# Altium PCB BMS.PcbDoc
Units mm, origin at the board's own origin, x right, y up, seen from the top; angles counter-clockwise.
Board outline 136.1 x 96.8 mm, 2 copper layers (Component Side, Solder Side); 92 components, 118 nets, 443 pads, 147 vias.
Unrouted connection lines stored in the file: 4.
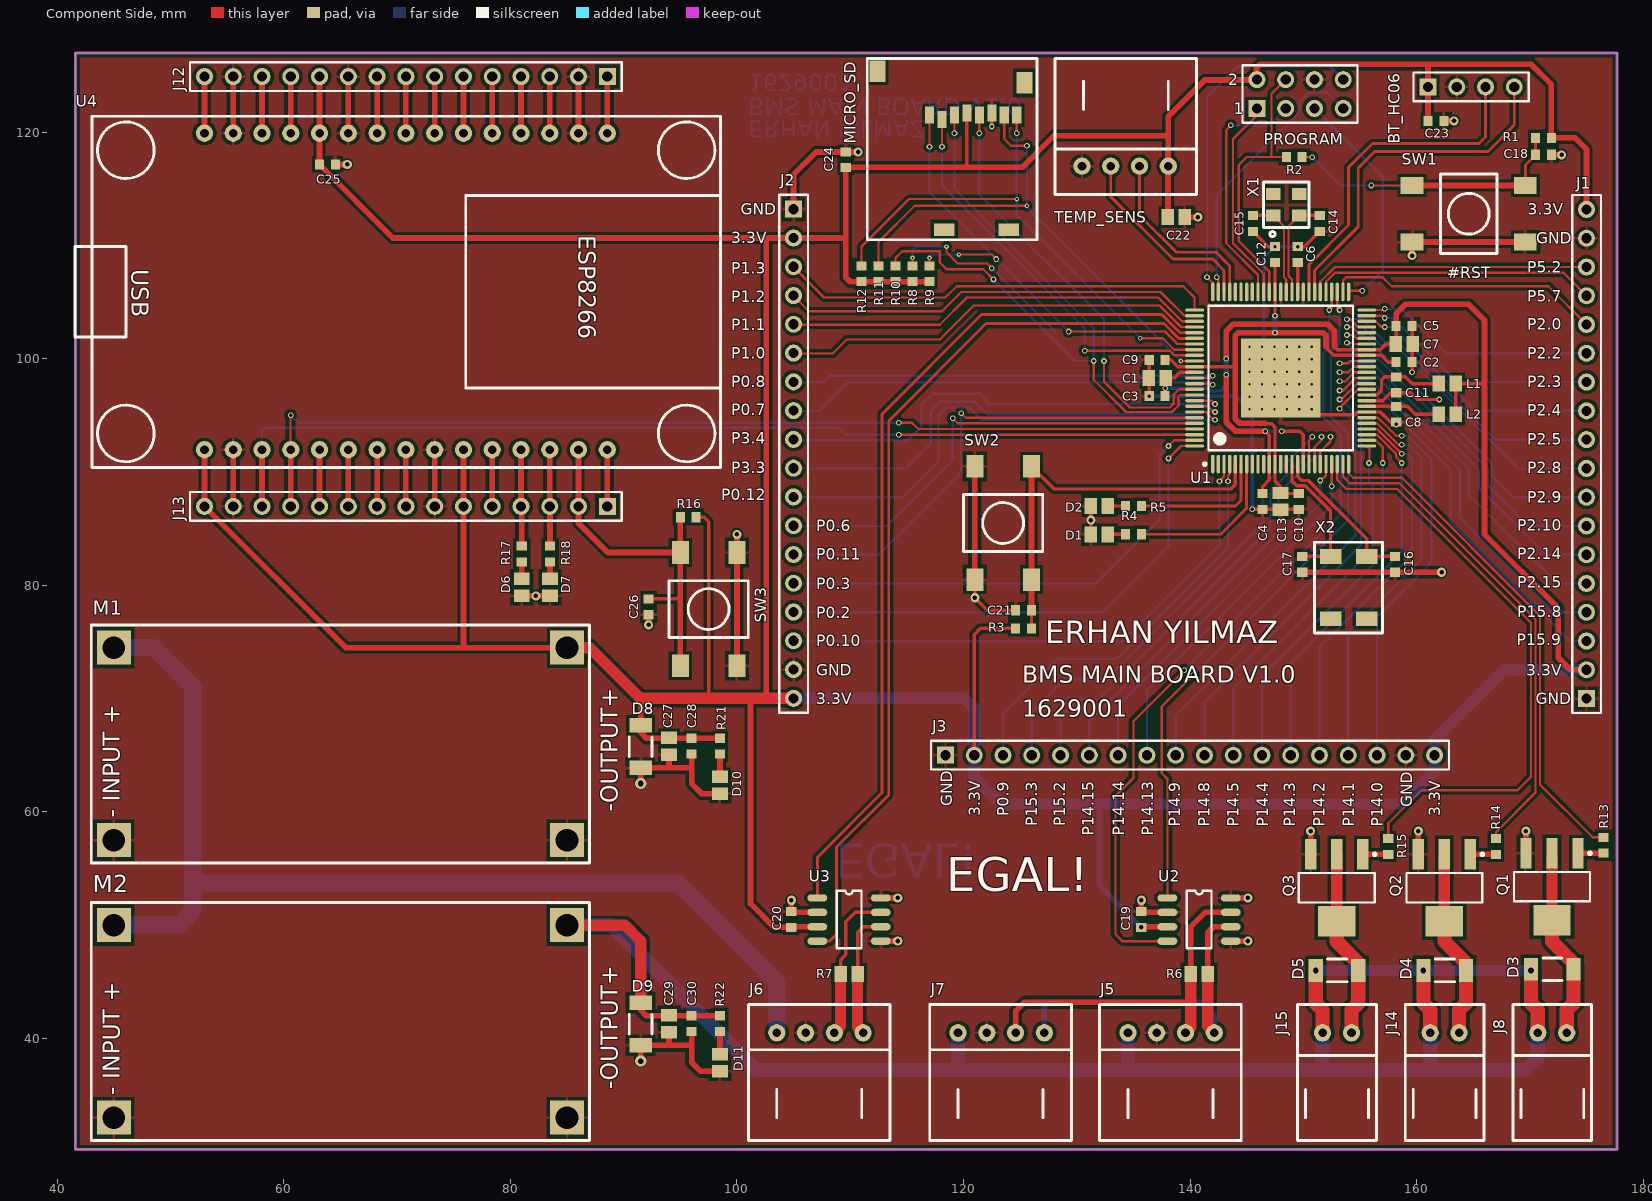
[diagram p0: Component Side view]
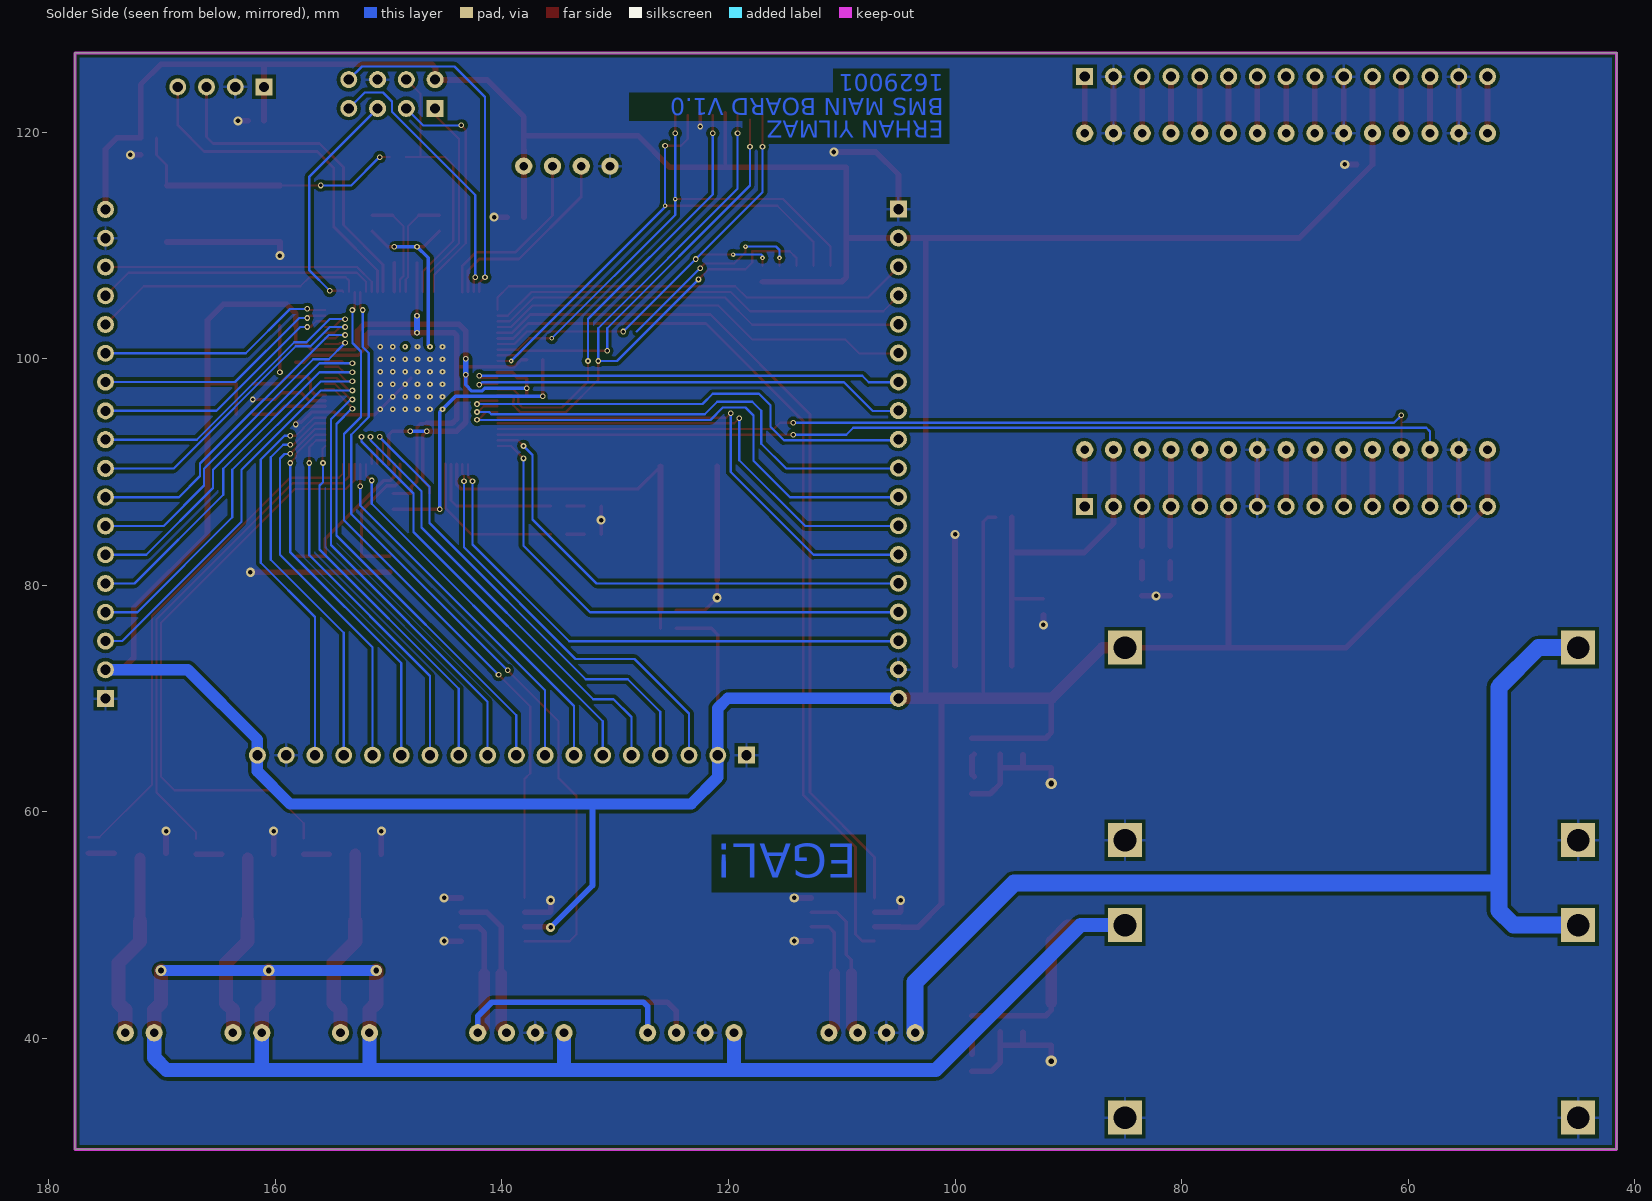
[diagram p1: Solder Side view, seen from below]

## Layer stack, top to bottom
Component Side: signal copper 0.0356
Dielectric: core 0.32, FR-4, Dk 4.8
Solder Side: signal copper 0.0356

## Board outline
41.6,30.2 41.6,127 177.7,127 177.7,30.2

## Design rules (kind name [scope] priority, off if disabled: settings)
Clearance Clearance_1 [All vs InPolygon] p1: gap=0.3
Clearance [All] p2: gap=0.2
PolygonConnect PolygonConnect_1 [IsVia] p1: connectstyle=Direct reliefconductorwidth=0.254 reliefentries=4 polygonreliefangle="90 Angle"
PolygonConnect [All] p2: connectstyle=Relief reliefconductorwidth=0.254 reliefentries=4 polygonreliefangle="90 Angle"
RoutingVias [All] p1: holewidth=0.5 width=0.8 viastyle="Through Hole" minholewidth=0.3 minwidth=0.5 maxholewidth=0.8 maxwidth=1
SilkscreenOverComponentPads [All] p1: minsilkscreentomaskgap=0.254
SolderMaskExpansion [All] p1: expansion=0.102
Width [All] p1: maxlimit=2 minlimit=0.2 preferedwidth=0.254
27 further rules are at their usual default settings.

## Classes and differential pairs
component class Sheet1: C1 C2 C3 C4 C5 C6 C7 C8 C9 C10 C11 C12 C13 C14 C15 C16 C17 C18 C19 C20 C21 D1 D2 J1 J2 J3 J5 J6 J7 L1 L2 PROGRAM R1 R2 R3 R4 R5 R6 R7 SW1 SW2 U1 U2 U3 X1 X2
component class Sheet2: BT_HC06 C21 C22 C24 C25 C26 C27 C28 C29 C30 D3 D4 D5 D6 D7 D8 D9 D10 D11 J8 J12 J13 J14 J15 M1 "M1 12V" M2 "M2 3.3V" MICRO_SD Q1 Q2 Q3 R8 R9 R10 R11 R12 R13 R14 R15 R16 R17 R18 R21 R22 SW3 TEMP_SENS U4

## Components (designator, comment, footprint, x,y, rotation, side; value= is the part's Value field where it differs from the comment)
BT_HC06 "HC-06 BT Module" HDR1X4 161,124 r0 top (schematic designator J11)
C1 "10uF" C0805 137.1,98.3 r0 top
C2 "10uF" C0805 158.9,101.3 r180 top
C3 "100nF" 1608[0603]#1 137.1,96.7 r0 top
C4 "100nF" 1608[0603]#1 146.4,87.4 r90 top
C5 "100nF" 1608[0603]#1 158.9,102.9 r180 top
C6 "100nF" 1608[0603]#1 149.5,109.2 r270 top
C7 "100nF" 1608[0603]#1 158.2,97.7 r90 top
C8 "100nF" 1608[0603]#1 158.2,95.1 r90 top
C9 "100nF" 1608[0603]#1 137.1,99.9 r0 top
C10 "100nF" 1608[0603]#1 149.6,87.4 r90 top
C11 "100nF" 1608[0603]#1 158.9,99.7 r180 top
C12 "100nF" 1608[0603]#1 147.5,109.2 r270 top
C13 "10uF" C0805 148,87.4 r90 top
C14 "15pF" 1608[0603]#1 151.45,111.95 r90 top
C15 "15pF" 1608[0603]#1 145.55,111.95 r90 top
C16 "15pF" 1608[0603]#1 158.1,81.85 r90 top
C17 "15pF" 1608[0603]#1 149.9,81.85 r90 top
C18 "10n" 1608[0603]#1 171.2,118 r180 top
C19 "Cap Semi" 1608[0603]#1 135.7,50.5 r270 top
C20 "100nF" 1608[0603]#1 104.8,50.5 r270 top
C21 "10nF" 1608[0603]#1 125.3,77.8 r0 top
C22 "10uF" C0805 138.8,112.5 r180 top
C23 "Cap Semi" 1608[0603]#1 161.7,121 r180 top
C24 "100nF" 1608[0603]#2 109.6,117.6 r270 top
C25 "100nF" 1608[0603]#1 63.85,117.15 r180 top
C26 "10nF" 1608[0603]#1 92.2,78.1 r90 top
C27 "10uF" C0805 94,65.8 r90 top
C28 "100nF" 1608[0603]#1 96,65.8 r90 top
C29 "Cap Semi" C0805 94,41.3 r90 top
C30 "100nF" 1608[0603]#1 96,41.3 r90 top
D1 "SMD LED" C0805 132,84.5 r180 top
D2 "SMD LED" C0805 132,87 r180 top
D3 "LL4148" LL4148 171.95,46.1 r180 top
D4 "LL4148" LL4148 162.45,46 r180 top
D5 "LL4148" LL4148 152.95,46 r180 top
D6 "SMD LED" C0805 81,79.818 r270 top
D7 "SMD LED" C0805 83.5,79.818 r270 top
D8 "4.2V SMD Zener Diode" LL4148 91.5,65.8 r90 top
D9 "15V SMD Zener Diode" LL4148 91.5,41.3 r90 top
D10 "SMD LED" C0805 98.5,62.35 r270 top
D11 "SMD LED" C0805 98.5,37.85 r270 top
J1 "GPIO EXPAND 1" HDR1X18 175,70 r90 top
J2 "GPIO EXPAND 3" HDR1X18 105,113.2 r270 top
J3 "GPIO EXPAND 2" HDR1X18 118.41,65 r0 top
J5 "CAN0_1" "4 Pin header" 138.3,37 r0 top
J6 "CAN1_0" "4 Pin header" 107.3,37 r0 top
J7 "CAN0_2" "4 Pin header" 123.3,37 r0 top
J8 "Contactor 1" "2 Pin Header" 172,38.5 r0 top
J12 "Header, 15-Pin" HDR1X15 88.558,124.908 r180 top
J13 "Header, 15-Pin" HDR1X15 88.558,86.968 r180 top
J14 "Contactor 2" "2 Pin Header" 162.5,38.5 r0 top
J15 "Contactor 3" "2 Pin Header" 153,38.5 r0 top
L1 "BLM8PG600" C0805 162.7,97.8 r0 top
L2 "BLM8PG600" C0805 162.7,95.1 r0 top
M1 "Buck Module 3.3VV" "Buck Module" 65,66 r0 top
M2 "Buck Module 12V" "Buck Module" 65,41.5 r0 top
MICRO_SD "3M_2908-05WB" 3M_2908-05WB 117,121.5 r0 top (schematic designator J9)
PROGRAM "Debug Conn" HDR2X4 145.9,122.1 r0 top (schematic designator J4)
Q1 "IRLL2705" SOT223_M 171.95,53.4 r270 top
Q2 "IRLL2705" SOT223_M 162.45,53.3 r270 top
Q3 "IRLL2705" SOT223_M 152.95,53.3 r270 top
R1 "10K" 1608[0603]#1 171.2,119.5 r180 top
R2 "10K" 1608[0603]#1 149.2,117.8 r0 top
R3 "Res1" 1608[0603]#1 125.3,76.2 r0 top
R4 "Res1" 1608[0603]#1 135,84.5 r0 top
R5 "1K" 1608[0603]#1 135,87 r0 top
R6 "120R" C0805 140.8,45.7 r180 top
R7 "120R" C0805 109.9,45.7 r180 top
R8 "10K" 1608[0603]#1 115.5,107.5 r270 top
R9 "10K" 1608[0603]#1 117,107.5 r270 top
R10 "10K" 1608[0603]#1 114,107.5 r270 top
R11 "10K" 1608[0603]#1 112.5,107.5 r270 top
R12 "10K" 1608[0603]#1 111,107.5 r270 top
R13 "1K" 1608[0603]#1 176.5,57.05 r90 top
R14 "1K" 1608[0603]#1 167,56.95 r90 top
R15 "1K" 1608[0603]#1 157.5,56.95 r90 top
R16 "10K" 1608[0603]#1 95.7,86 r180 top
R17 "1K" 1608[0603]#1 81,82.768 r90 top
R18 "1K" 1608[0603]#1 83.5,82.768 r90 top
R21 "1K" 1608[0603]#1 98.5,65.8 r90 top
R22 "1K" 1608[0603]#1 98.5,41.3 r90 top
SW1 "RST" "Push Button SMD" 164.6,112.8 r270 top
SW2 "Push Button" "Push Button SMD" 123.5,85.5 r180 top
SW3 "Push Button" "Push Button SMD" 97.5,77.9 r0 top
TEMP_SENS "Temp Sensor Conn" "4 Pin Header" 134.3,120.5 r180 top (schematic designator J10)
U1 "XMC4500-F100K1024 AB" INF-PG-LQFP-100-11-7000X7000TP_N 148,98.3 r90 top
U2 "SN65HVD233D" "SOIC 8" 140.8,50.5 r0 top
U3 "SN65HVD233D" "SOIC 8" 109.9,50.5 r0 top
U4 "NodeMCU" NodeMCU 70.778,105.908 r270 top
X1 "12MHz" "SMD Crystall 23.2x2.5mm" 148.5,113.6 r0 top
X2 "32.768kHz" "32kHz smd Crystal" 154,79.8 r270 top

## Footprints (in the part's own frame and the unit in brackets; to place one, negate y for a bottom-side part, rotate by r counter-clockwise, add the part's x,y. Pads: shape width x height; smd on the part's side, far side on the other; paste and mask are expansions set on the pad)
"2 Pin Header" [mil]
  round 60 hole 30: 1(-51.18,78.74) 2(49.21,78.74)
  silkscreen extent -138,-295 136,177
3M_2908-05WB [mm] "3M_2908-05WB micro sd card connector"
  rect 0.8x1.5 smd: 1(0,0) 2(1.1,-0.4) 3(2.2,0) 4(3.3,0.2) 5(4.4,0) 6(5.5,0.2) 7(6.6,0) 8(7.7,0)
  rect 1.4x1.9 smd: S1(-4.6,3.9) S4(8.4,2.85)
  rect 1.8x1.1 smd: S2(1.3,-10.1) S3(7,-10.1)
  silkscreen extent -5.5,-11 9.5,5
"4 Pin header" [mil] "For can bus connectors"
  round 60 hole 30: 1(-148.82,137.8) 2(-48.82,137.8) 3(51.18,137.8) 4(151.18,137.8)
  silkscreen extent -247,-236 245,236
"4 Pin Header" [mil] "For can bus connectors"
  round 60 hole 30: 1(-148.82,137.8) 2(-48.82,137.8) 3(51.18,137.8) 4(151.18,137.8)
  silkscreen extent -247,-236 245,236
"32kHz smd Crystal" [mm]
  rect 1.3x1.9 smd: 1(-2.75,-1.6) 2(-2.75,1.6) 3(2.75,-1.6) 4(2.75,1.6)
  silkscreen extent -4,-3 4,3
1608[0603]#1 [mm] "Chip Capacitor, Body 1.6x0.8mm, IPC High Density"
  rect 0.8x0.9 smd: 1(-0.7,0) 2(0.7,0)
  body extent -0.87,-0.48 0.87,0.48, height 1.3
1608[0603]#2 [mm] "Chip Capacitor, Body 1.6x0.8mm, IPC High Density"
  rect 0.8x0.9 smd: 1(-0.65,0) 2(0.7,0)
  body extent -0.87,-0.48 0.87,0.48, height 1.3
"Buck Module" [mm] "LM2596HVS/LM2596S Buck Converter Module Footprint"
  rect 3x3 hole 2: 1(-20,8.5) 2(-20,-8.5) 3(20,-8.5) 4(20,8.5)
  silkscreen extent -22,-10.5 22,10.5
C0805 [mm] "Chip Capacitor, Body 2.0x1.3mm, IPC High Density"
  rect 1.1x1.4 smd: 1(-0.75,0) 2(0.75,0)
  body extent -1.1,-0.72 1.1,0.72, height 1.4
HDR1X4 [mm] "Connector; Header; 4 Position"
  rect 1.5x1.5 hole 0.9: 1(0,0)
  round 1.5 hole 0.9: 2(2.54,0) 3(5.08,0) 4(7.62,0)
  silkscreen extent -1.27,-1.27 8.89,1.27
HDR1X15 [mm] "Connector; Header; 15 Position"
  rect 1.5x1.5 hole 0.9: 1(0,0)
  round 1.5 hole 0.9: 2(2.54,0) 3(5.08,0) 4(7.62,0) 5(10.16,0) 6(12.7,0) 7(15.24,0) 8(17.78,0) 9(20.32,0) 10(22.86,0) 11(25.4,0) 12(27.94,0) 13(30.48,0) 14(33.02,0) 15(35.56,0)
  silkscreen extent -1.27,-1.27 36.83,1.27
HDR1X18 [mm] "Connector; Header; 18 Position"
  rect 1.5x1.5 hole 0.9: 1(0,0)
  round 1.5 hole 0.9: 2(2.54,0) 3(5.08,0) 4(7.62,0) 5(10.16,0) 6(12.7,0) 7(15.24,0) 8(17.78,0) 9(20.32,0) 10(22.86,0) 11(25.4,0) 12(27.94,0) 13(30.48,0) 14(33.02,0) 15(35.56,0) 16(38.1,0) 17(40.64,0) 18(43.18,0)
  silkscreen extent -1.27,-1.27 44.45,1.27
HDR2X4 [mm] "Connector; Header; 4x2 Position"
  rect 1.5x1.5 hole 0.9: 1(0,0)
  round 1.5 hole 0.9: 2(0,2.54) 3(2.54,0) 4(2.54,2.54) 5(5.08,0) 6(5.08,2.54) 7(7.62,0) 8(7.62,2.54)
  silkscreen extent -1.27,-1.27 8.89,3.81
INF-PG-LQFP-100-11-7000X7000TP_N [mm] "QFP, 100-Leads, Body 14x14mm, Pitch 0.5mm, Thermal Pad 7x7mm, IPC Medium Density"
  oval 1.65x0.3 smd: 1(-7.6,6) 2(-7.6,5.5) 3(-7.6,5) 4(-7.6,4.5) 5(-7.6,4) 6(-7.6,3.5) 7(-7.6,3) 8(-7.6,2.5) 9(-7.6,2) 10(-7.6,1.5) 11(-7.6,1) 12(-7.6,0.5) 13(-7.6,0) 14(-7.6,-0.5) 15(-7.6,-1) 16(-7.6,-1.5) 17(-7.6,-2) 18(-7.6,-2.5) 19(-7.6,-3) 20(-7.6,-3.5) 21(-7.6,-4) 22(-7.6,-4.5) 23(-7.6,-5) 24(-7.6,-5.5) 25(-7.6,-6) 51(7.6,-6) 52(7.6,-5.5) 53(7.6,-5) 54(7.6,-4.5) 55(7.6,-4) 56(7.6,-3.5) 57(7.6,-3) 58(7.6,-2.5) 59(7.6,-2) 60(7.6,-1.5) 61(7.6,-1) 62(7.6,-0.5) 63(7.6,0) 64(7.6,0.5) 65(7.6,1) 66(7.6,1.5) 67(7.6,2) 68(7.6,2.5) 69(7.6,3) 70(7.6,3.5) 71(7.6,4) 72(7.6,4.5) 73(7.6,5) 74(7.6,5.5) 75(7.6,6)
  oval 0.3x1.65 smd: 26(-6,-7.6) 27(-5.5,-7.6) 28(-5,-7.6) 29(-4.5,-7.6) 30(-4,-7.6) 31(-3.5,-7.6) 32(-3,-7.6) 33(-2.5,-7.6) 34(-2,-7.6) 35(-1.5,-7.6) 36(-1,-7.6) 37(-0.5,-7.6) 38(0,-7.6) 39(0.5,-7.6) 40(1,-7.6) 41(1.5,-7.6) 42(2,-7.6) 43(2.5,-7.6) 44(3,-7.6) 45(3.5,-7.6) 46(4,-7.6) 47(4.5,-7.6) 48(5,-7.6) 49(5.5,-7.6) 50(6,-7.6) 76(6,7.6) 77(5.5,7.6) 78(5,7.6) 79(4.5,7.6) 80(4,7.6) 81(3.5,7.6) 82(3,7.6) 83(2.5,7.6) 84(2,7.6) 85(1.5,7.6) 86(1,7.6) 87(0.5,7.6) 88(0,7.6) 89(-0.5,7.6) 90(-1,7.6) 91(-1.5,7.6) 92(-2,7.6) 93(-2.5,7.6) 94(-3,7.6) 95(-3.5,7.6) 96(-4,7.6) 97(-4.5,7.6) 98(-5,7.6) 99(-5.5,7.6) 100(-6,7.6)
  rect 7x7 smd: 101(0,0)
  silkscreen extent -7.72,-6.38 6.38,6.82, body extent -7,-7 7,7, height 1.6
LL4148 [mm] "SMD 1N4148 Fast Diode"
  rect 1.25x2 smd: 1(-1.9,0) 2(1.85,0)
  silkscreen extent -0.9,-1 0.8,1
NodeMCU [mil] "LoLin NodeMCU Foot print"
  round 60 hole 30: 1(-551.18,700) 2(-551.18,600) 3(-551.18,500) 4(-551.18,400) 5(-551.18,300) 6(-551.18,200) 7(-551.18,100) 8(-551.18,0) 9(-551.18,-100) 10(-551.18,-200) 11(-551.18,-300) 12(-551.18,-400) 13(-551.18,-500) 14(-551.18,-600) 15(-551.18,-700) 16(548.82,-700) 17(548.82,-600) 18(548.82,-500) 19(548.82,-400) 20(548.82,-300) 21(548.82,-200) 22(548.82,-100) 23(548.82,0) 24(548.82,100) 25(548.82,200) 26(548.82,300) 27(548.82,400) 28(548.82,500) 29(548.82,600) 30(548.82,700)
  silkscreen extent -610,-1150 610,1094
"Push Button SMD" [mm] "Push Button SMD Package"
  rect 1.5x2 smd: 1(-2.5,5) 2(-2.5,-5) 3(2.5,-5) 4(2.5,5)
  silkscreen extent -3.5,-2.5 3.5,2.5
"SMD Crystall 23.2x2.5mm" [mm]
  rect 1.3x1.05 smd: 1(-1.15,-0.95) 2(1.15,-0.95) 3(1.15,0.95) 4(-1.15,0.95)
  silkscreen extent -2,-2.82 2,2
"SOIC 8" [mm] "SOIC 8 foot print"
  oval 1.75x0.65 smd: 1(-2.8,1.9) 2(-2.8,0.63) 3(-2.8,-0.64) 4(-2.8,-1.91) 5(2.8,-1.91) 6(2.8,-0.64) 7(2.8,0.63) 8(2.8,1.9)
  silkscreen extent -1.09,-2.55 1.09,2.53
SOT223_M [mm] "SOT223, 4-Leads, Body 6.5x3.5mm, Pitch 2.3mm, Lead Span 7mm, IPC Low Density"
  rect 2.7x1 smd: 1(-2.95,2.3) 2(-2.95,0) 3(-2.95,-2.3)
  rect 2.7x3.3 smd: 4(2.95,0)
  silkscreen extent -3.07,-3.35 1.3,3.48, body extent -1.85,-3.35 1.85,3.35, height 1.7

## Part data
BT_HC06 TEMP_SENS: library part MHDR1X4, "Header, 4-Pin"
C1 C2 C3 C4 C5 C6 C7 C8 C9 C10 C11 C12 C13 C14 C15 C16 C17 C18 C20 C21 C22 C24 C25 C26 C27 C28 C30: library part "Cap Semi"
C19 C23 C29: "Capacitor (Semiconductor SIM Model)"
D1 D2 D6 D7 D10 D11: library part LED0
D3 D4 D5: "LL4148 Fast SMD Diode"
D8 D9: library part "D Zener"
J1 J2 J3: library part MHDR1X18, "Header, 18-Pin"
J5 J6 J7: library part "4 Pin Vertical Header", "4 pin header for CAN bus connectors"
J8 J14 J15: library part "2 Pin Header", "2 Pin Header"
J12 J13: library part MHDR1X15
L1 L2: library part Res2
M1 M2: library part "LM2596HVS Module", "LM2596HVS/LM2596S Buck Converter Module"
MICRO_SD: library part "SD/MMC Card"
PROGRAM: library part MHDR2X4, "Header, 4-Pin, Dual row"
Q1 Q2 Q3: library part NMOS-2
R1 R2 R5 R6 R7 R8 R9 R10 R11 R12 R13 R14 R15 R16 R17 R18 R21 R22: library part Res1
R3 R4: "Resistor"
SW1: library part "Push Button", "General purposes push button"
SW2 SW3: "General purposes push button"
U1: "120 MHz XMC4500 MCU with 1,024 KByte Program Memory, 160 KByte SRAM, 3.3 V, -40 to 125 degC, PG-LQFP-100, Green"
U2 U3: "SN65HVD233D 3.3V Can Tranceiver"
U4: "LoLin NodeMCU V0.1"
X1 X2: library part Crystall, "General purposes crystall symbol"

## Via types
v1: diameter 0.5, hole 0.3, Component Side to Solder Side, 76 vias
v2: diameter 0.5, hole 0.2, Component Side to Solder Side, 36 vias
v3: diameter 0.8, hole 0.4, Component Side to Solder Side, 22 vias
v4: diameter 0.4, hole 0.2, Component Side to Solder Side, 8 vias
v5: diameter 1, hole 0.5, Component Side to Solder Side, 5 vias

## Nets (pads, with @x,y where several pads share a name; then routed paths per layer and width w, separated by ;. In a path a pad name is that pad's centre, name@x,y a point inside that pad or via, vN(x,y) a via of type N, cw(c..) or ccw(c..) an arc to the next point about the centre after c; other vN are vias at no path point)
3.3V: BT_HC06.1 C1.2 C2.2 C3.2 C4.2 C5.2 C6.2 C19.2 C20.2 C22.2 C23.2 C24.2 C25.2 C27.2 C28.2 D8.2 J1.2 J1.18 J2.2 J2.18 J3.2 J3.18 J12.11 J13.6 J13.15 L1.2 L2.2 M1.4 MICRO_SD.4 PROGRAM.2 R1.1 R3.1 R8.2 R9.2 R10.2 R11.2 R12.2 R16.1 R21.2 TEMP_SENS.1 U1.11 U1.17 U1.43 U1.60 U1.87 U2.3 U3.3 U4.11 U4.16 U4.25 | length 568.6
  Component Side w0.3: R16.1 97.1,86 97.5,85.6 97.5,70.02 ; 120.3,116.9 MICRO_SD.4 ; J3.2 120.95,75.65 121.5,76.2 R3.1 ; C3.2 137.8,98.25 C1.2 138.6,98.3 139.1,98.8 U1.87 ; C4.2 146.4,88.7 147,89.3 U1.11 147,93.25 v1(146.65,93.6) ; v1@148.25,93.6 149.7,93.6 150,93.3 U1.17 ; U1.60 C6.2 ; 152.75,101.05 153,100.8 U1.43 156.8,100.8 157.3,101.3 C2.2 158.2,101.35 C5.2 ; L2.2 L1.2 166,97.8
  Component Side w0.5: U4.16 J13.15 65.466,74.5 75.9,74.5 ; J12.11 U4.11 63.158,117.158 C25.2 63.15,117.134 69.624,110.66 102.5,110.66 ; U4.25 J13.6 75.858,74.542 75.9,74.5 ; M1.4 75.9,74.5 ; 91.48,70.02 91.5,70 D8.2 91.5,67 92,66.5 C28.2 R21.2 ; 101.2,70.02 101.2,51.9 103.3,49.8 C20.2 104.86,49.86 U3.3 ; 102.6,70.02 102.6,110.56 102.5,110.66 ; R9.2 R10.2 R12.2 110,106.8 109.6,107.2 109.6,110.6 ; v3(135.7,49.8) 135.76,49.86 U2.3 ; C22.2 138.05,118.45 ; TEMP_SENS.1 138.08,119.7 ; v1(143.2,98.6) 143.2,94.4 144,93.6 v1(146.65,93.6) ; v1(143.2,100) 143.2,102.45 143.8,103.05 152.15,103.05 152.75,102.45 152.75,101.05 ; PROGRAM.2 PROGRAM.2@145.86,124.6 ; C5.2 158.2,104 159,104.8 164.6,104.8 166,103.4 166,97.8 166,84.5 172.5,78 172.5,73.6 173.56,72.54 J1.2 ; C23.2 BT_HC06.1 161,126 ; J1.18 175,118.5 174,119.5 R1.1 171.9,124.2 170.1,126 161,126 ; 102.5,110.66 J2.2 109.54,110.66 109.6,110.6 ; 109.6,110.6 C24.2 120.3,116.9 125.2,116.9 128,119.7 138.08,119.7 ; 138.08,119.7 138.08,121.38 141.3,124.6 PROGRAM.2@145.86,124.6 ; PROGRAM.2@145.86,124.6 145.86,125.66 146.2,126 161,126
  Component Side w1: M1.4 87,74.5 91.48,70.02 97.5,70.02 101.2,70.02 102.6,70.02 J2.18
  Solder Side w0.3: v1(137.8,97.4) 141.522,97.4 141.772,97.15 142.65,97.15 143.2,97.7 v1(143.2,98.6) ; v1(146.65,93.6) v1(148.1,93.6)
  Solder Side w0.5: 132,60.7 132,53.5 v3(135.7,49.8) ; v1(143.2,98.6) v1(143.2,100)
  Solder Side w1: J2.18 120.08,70.02 120.95,69.15 J3.2 120.95,63.05 123.3,60.7 132,60.7 158.7,60.7 161.59,63.59 J3.18 161.59,66.39 167.74,72.54 J1.2
12V: C29.2 C30.2 D3.2 D4.2 D5.2 D9.2 J5.1 J7.1 J8.1 J14.1 J15.1 M2.4 R22.2 | length 163.5
  Component Side w0.5: D9.2 91.5,42.5 92,42 C30.2 R22.2
  Component Side w1: M2.4 90.1,50 91.5,48.6 D9.2
  Component Side w1.25: v5(151.1,46) 151.1,43.1 151.7,42.5 J15.1 ; v5(160.6,46) 160.6,43.1 161.2,42.5 J14.1 ; v5(170.1,46) 170.1,43.1 170.7,42.5 J8.1
  Solder Side w1: v5(151.1,46) v5(160.6,46) v5(170.1,46)
  Solder Side w1.25: M2.4 88.9,50 101.7,37.2 119.4,37.2 ; J7.1 119.52,37.32 119.4,37.2 ; J5.1 134.52,37.22 134.5,37.2 ; J15.1 151.7,37.2 ; J14.1 161.2,37.2 ; J8.1 170.7,38.3 169.6,37.2 161.2,37.2 ; 119.4,37.2 134.5,37.2 ; 134.5,37.2 151.7,37.2 ; 151.7,37.2 161.2,37.2
BT_RX: BT_HC06.4 U1.57 | length 31.3
  Component Side w0.25: U1.57 151,107.8 154.85,111.65 154.85,116.85 156.3,118.3 166.3,118.3 168.62,120.62 BT_HC06.4
BT_TX: BT_HC06.3 U1.58 | length 30.1
  Component Side w0.25: U1.58 150.5,108.3 154,111.8 154,116.9 156.1,119 165.5,119 166.08,119.58 BT_HC06.3
CAN0_RX: U1.54 U2.4 | length 70.7
  Component Side w0.2: U2.4 134.02,48.59 133.41,49.2 133.41,61.41 135,63 135,68 v1(139.5,72.5) ; v1(152.3,104.3) 152.5,104.5 U1.54
  Solder Side w0.2: v1(139.5,72.5) 153.3,86.3 153.3,93.3 151.75,94.85 151.75,100.5 152.3,101.05 v1(152.3,104.3)
CAN0_TX: U1.53 U2.1 | length 61.5
  Component Side w0.2: U2.1 138,62.9 137.5,63.4 137.5,69.3 v1(140.3,72.1) ; U1.53 153,104.5 v1(153.2,104.3)
  Solder Side w0.2: v1(140.3,72.1) 141.5,73.3 153.95,85.75 153.95,93.35 152.45,94.85 152.45,100.65 153.2,101.4 v1(153.2,104.3)
CAN1_RX: U1.81 U3.4 | length 80.3
  Component Side w0.25: U3.4 108.19,48.59 108.8,49.2 108.8,56.9 113.4,61.5 113.4,94.5 122,103.1 137.7,103.1 139,101.8 U1.81
CAN1_TX: U1.80 U3.1 | length 77
  Component Side w0.25: U3.1 107.1,56 112.8,61.7 112.8,95.1 121.6,103.9 137.5,103.9 139.1,102.3 U1.80
CONTACTOR1: R13.2 U1.25 | length 45.3
  Component Side w0.2: U1.25 154,89.9 154.4,89.5 158.7,89.5 170.9,77.3 170.9,62.4 175.55,57.75 R13.2
CONTACTOR2: R14.2 U1.24 | length 44.2
  Component Side w0.2: U1.24 153.5,89.6 154.1,89 158.5,89 170.5,77 170.5,61.7 167,58.2 R14.2@167,57.6
CONTACTOR3: R15.2 U1.23 | length 53
  Component Side w0.2: U1.23 153,89.3 153.8,88.5 158.3,88.5 170.1,76.7 170.1,63.1 168.9,61.9 160.4,61.9 157.5,59 R15.2
GND: BT_HC06.2 C1.1 C2.1 C3.1 C4.1 C5.1 C6.1 C7.1 C8.1 C9.1 C10.1 C11.1 C12.1 C13.1 C14.1 C15.1 C16.1 C17.1 C18.1 C19.1 C20.1 C21.1 C22.1 C23.1 C24.1 C25.1 C26.1 C27.1 C28.1 C29.1 C30.1 D1.2 D2.2 D6.2 D7.2 D8.1 D9.1 D10.2 D11.2 J1.1 J1.17 J2.1 J2.17 J3.1 J3.17 J5.2 J6.2 J7.2 J12.2 J12.10 J12.14 J13.7 J13.14 M1.2 M1.3 M2.2 M2.3 MICRO_SD.6 PROGRAM.6 Q1.3 Q2.3 Q3.3 SW1.3 SW1.4 SW2.3 SW2.4 SW3.3 SW3.4 TEMP_SENS.4 U1.32 U1.34 U1.59 U1.63 U1.101 U2.2 U2.5 U2.8 U3.2 U3.5 U3.8 U4.2 U4.10 U4.14 U4.17 U4.24 | length 205.6
  Component Side w0.3: SW2.4 v3(121,78.9) 122.1,77.8 C21.1 ; v1(122.5,120.5) MICRO_SD.6 ; D1.2 v3(131.25,85.75) D2.2 ; v1(136.4,96.7) C9.1 ; v1(145.5,86.7) C4.1 C10.1 ; C15.1 146.9,109.9 v1(147.5,109.9) ; U1.101 v2(148.55,97.75) v2(149.65,96.65) v2(150.75,95.55) 151.25,95.05 154.539,95.05 ; v1(149.5,109.9) 150.1,109.9 C14.1 ; 154.4,95.189 154.539,95.05 ; U1.34 157,96.3 157.7,97 C7.1 159.5,97 160.1,96.4 v1(162,96.4) ; C8.1 157.7,94.4 156.8,95.3 U1.32 154.789,95.3 154.539,95.05 ; v1(159.6,98.8) C11.1 C5.1
  Component Side w0.5: J13.14 U4.17 ; U4.14 J12.14 ; C25.1 v3(65.6,117.15) ; U4.10 J12.10 ; J13.7 U4.24 ; D6.2 v3(82.25,79.068) D7.2 ; U4.2 J12.2 ; v5(91.5,38) D9.1 94,39.4 ; v5(91.5,62.5) D8.1 94,63.9 ; v3(92.2,76.5) C26.1 ; C29.1 94,39.4 ; C27.1 94,63.9 ; C30.1 96,39.4 ; C28.1 96,63.9 ; D11.2 96.8,37.1 96,37.9 96,39.4 ; D10.2 96.9,61.6 96,62.5 96,63.9 ; SW3.3 SW3.4 v3(100,84.5) ; v3(104.8,52.2) C20.1 104.87,51.13 U3.2 ; J2.1 105,116.25 107,118.25 C24.1 v3(110.7,118.25) ; U3.5 112.71,48.6 v3(114.2,48.6) ; U3.8 v3(114.2,52.4) ; SW2.4 SW2.3 ; v3(135.7,52.2) C19.1 135.77,51.13 U2.2 ; C22.1 v3(140.7,112.5) ; U2.5 145.09,48.59 v3(145.1,48.6) ; U2.8 v3(145.1,52.4) ; C17.1 C16.1 v3(162.2,81.15) ; Q3.3 v3(150.65,58.3) ; v3(159.6,109.1) SW1.3 SW1.4 ; Q2.3 v3(160.15,58.3) ; C23.1 v3(163.3,121) ; Q1.3 v3(169.65,58.3) ; C18.1 v3(172.8,118) ; 94,39.4 96,39.4 ; 94,63.9 96,63.9
  Solder Side w0.3: v1(136.4,96.7) 144.1,96.7 v2(145.25,95.55) 145.5,95.3 v1(145.5,86.7) ; v2(146.35,101.05) 146.5,101.2 146.5,108.9 v1(147.5,109.9) v1(149.5,109.9) ; v2@148.5,101.1 v2(148.55,101.05) ; v1@159.55,98.75 v1(159.6,98.8)
  other v1: 158.2,94.2
  other v2: 146.35,95.55 147.45,95.55 148.55,95.55 149.65,95.55 145.25,96.65 146.35,96.65 147.45,96.65 148.55,96.65 150.75,96.65 145.25,97.75 146.35,97.75 147.45,97.75 149.65,97.75 150.75,97.75 145.25,98.85 146.35,98.85 147.45,98.85 148.55,98.85 149.65,98.85 150.75,98.85 145.25,99.95 146.35,99.95 147.45,99.95 148.55,99.95 149.65,99.95 150.75,99.95 145.25,101.05 147.45,101.05 149.65,101.05 150.75,101.05
GPIO0.2: J2.15 U1.100 | length 46
  Component Side w0.2: v1(138.1,91.2) 139.2,92.3 U1.100
  Solder Side w0.2: J2.15@105,77.61 132.21,77.61 138.1,83.5 v1(138.1,91.2)
GPIO0.3: J2.14 U1.99 | length 44
  Component Side w0.2: v1(138.1,92.3) 138.6,92.8 U1.99
  Solder Side w0.2: J2.14@105,80.15 131.65,80.15 137.3,85.8 137.3,91.5 v1(138.1,92.3)
GPIO0.6: J2.12 U1.96 | length 41.7
  Component Side w0.2: v1(119.05,94.75) 119.5,94.3 U1.96
  Solder Side w0.2: J2.12@105,85.23 113.23,85.23 119.05,91.05 v1(119.05,94.75)
GPIO0.7: J2.8 U1.89 | length 39.8
  Component Side w0.2: U1.89 141.9,97.8 v1(142,97.7)
  Solder Side w0.2: J2.8@105,95.39 107.26,95.39 109.8,97.93 141.77,97.93 v1(142,97.7)
GPIO0.8: J2.7 U1.88 | length 38.9
  Component Side w0.2: U1.88 141.8,98.3 v1(142,98.5)
  Solder Side w0.2: J2.7@105,97.93 107.63,97.93 108.2,98.5 v1(142,98.5)
GPIO0.9: J3.3 U1.4 | length 37
  Component Side w0.2: v1(143.35,89.2) 143.35,89.7 143.5,89.85 U1.4
  Solder Side w0.2: J3.3 123.49,68.69 128.3,73.5 133.5,73.5 143.35,83.35 v1(143.35,89.2)
GPIO0.10: J2.16 U1.3 | length 48.4
  Component Side w0.2: v1(142.6,89.2) 143,89.6 U1.3
  Solder Side w0.2: J2.16@105,75.07 134.07,75.07 142.6,83.6 v1(142.6,89.2)
GPIO0.11: J2.13 U1.95 | length 43.8
  Component Side w0.2: v1(119.8,95.2) 120.2,94.8 U1.95
  Solder Side w0.2: J2.13@105,82.69 112.49,82.69 119.8,90 v1(119.8,95.2)
GPIO0.12: J2.11 U1.94 | length 45.4
  Component Side w0.2: U1.94 141.4,95.3 142.1,94.6 v1(142.2,94.6)
  Solder Side w0.2: J2.11@105,87.77 114.57,87.77 117.8,91 117.8,95 118.5,95.7 120.5,95.7 121.6,94.6 v1(142.2,94.6)
GPIO1.0: J2.6 U1.79 | length 37.9
  Component Side w0.2: J2.6@105,100.47 108.47,100.47 109.7,101.7 117.9,101.7 120.9,104.7 137.3,104.7 139.2,102.8 U1.79
GPIO1.1: J2.5 U1.78 | length 37.3
  Component Side w0.2: J2.5@105,103.01 117.91,103.01 120.3,105.4 137.2,105.4 139.3,103.3 U1.78
GPIO1.2: J2.4 U1.77 | length 37.5
  Component Side w0.2: J2.4@105,105.55 106.35,104.2 118.1,104.2 119.8,105.9 137.4,105.9 139.5,103.8 U1.77
GPIO1.3: J2.3 U1.76 | length 38.4
  Component Side w0.2: J2.3@105,108.09 107.69,105.4 118.4,105.4 119.4,106.4 139.4,106.4 140.4,105.4 U1.76
GPIO2.0: J1.14 U1.52 | length 24.4
  Component Side w0.2: U1.52 153.5,106.9 153.8,107.2 157,107.2 157.8,106.4 171.62,106.4 J1.14
GPIO2.2: J1.13 U1.50 | length 21.1
  Component Side w0.2: U1.50 157.1,104.3 v1(157.2,104.4)
  Solder Side w0.2: v1(157.2,104.4) 158.7,104.4 162.62,100.48 J1.13
GPIO2.3: J1.12 U1.49 | length 21.8
  Component Side w0.2: U1.49 157,103.8 v1(157.2,103.6)
  Solder Side w0.2: v1(157.2,103.6) 157.9,103.6 163.56,97.94 J1.12
GPIO2.4: J1.11 U1.48 | length 22.7
  Component Side w0.2: U1.48 156.4,103.3 156.9,102.8 v1(157.2,102.8)
  Solder Side w0.2: v1(157.2,102.8) 157.8,102.8 165.2,95.4 J1.11
GPIO2.5: J1.10 U1.47 | length 27.6
  Component Side w0.2: v1(153.85,103.5) 154.15,103.5 154.85,102.8 U1.47
  Solder Side w0.2: v1(153.85,103.5) 155.2,103.5 157.25,101.45 158.345,101.45 166.935,92.86 J1.10
GPIO2.8: J1.9 U1.46 | length 28.3
  Component Side w0.2: v1(153.85,102.8) 154.3,102.8 154.8,102.3 U1.46
  Solder Side w0.2: v1(153.85,102.8) 155.2,102.8 156.9,101.1 158.2,101.1 168.98,90.32 J1.9
GPIO2.9: J1.8 U1.45 | length 29.6
  Component Side w0.2: v1(153.85,102.1) 154.4,102.1 154.7,101.8 U1.45
  Solder Side w0.2: v1(153.85,102.1) 155.3,102.1 166.65,90.75 166.65,89.65 168.52,87.78 J1.8
GPIO2.10: J1.7 U1.44 | length 30.5
  Component Side w0.2: v1(153.85,101.4) 154.3,101.4 154.4,101.3 U1.44
  Solder Side w0.2: v1(153.85,101.4) 155.3,99.95 156.65,99.95 166.3,90.3 166.3,88.8 169.86,85.24 J1.7
GPIO2.14: J1.6 U1.41 | length 32.2
  Component Side w0.2: v1(153.2,99.6) 153.95,99.6 154.15,99.8 U1.41
  Solder Side w0.2: v1(153.2,99.6) 156.1,99.6 165.5,90.2 165.5,88.6 171.4,82.7 J1.6
GPIO2.15: J1.5 U1.40 | length 33.5
  Component Side w0.2: v1(153.2,98.8) 153.95,98.8 154.45,99.3 U1.40
  Solder Side w0.2: v1(153.2,98.8) 156.1,98.8 164.6,90.3 164.6,88 172.44,80.16 J1.5
GPIO3.3: J2.10 U1.93 | length 43.9
  Component Side w0.2: U1.93 141.6,95.8 142.1,95.3 v1(142.2,95.3)
  Solder Side w0.2: J2.10@105,90.31 114.91,90.31 117.1,92.5 117.1,95.4 117.9,96.2 121,96.2 122.1,95.1 140.95,95.1 141.15,95.3 v1(142.2,95.3)
GPIO3.4: J2.9 U1.92 | length 42.3
  Component Side w0.2: U1.92 141.9,96.3 v1(142.2,96)
  Solder Side w0.2: J2.9@105,92.85 105.05,92.8 115.1,92.8 116.3,94 116.3,95.9 117.3,96.9 121.4,96.9 122.3,96 v1(142.2,96)
GPIO5.2: J1.16 U1.56 | length 24.9
  Component Side w0.2: U1.56 151.5,106.795 152.805,108.1 J1.16
GPIO5.7: J1.15 U1.55 | length 25.1
  Component Side w0.2: U1.55 152,106.8 152.8,107.6 172.96,107.6 J1.15
GPIO14.0: J3.16 U1.31 | length 35.3
  Component Side w0.2: U1.31 156.6,94.8 157.5,93.9 157.5,93.896 158.196,93.2 v1(158.7,93.2)
  Solder Side w0.2: J3.16 156.51,77.21 161.3,82 161.3,91.1 159.2,93.2 v1(158.7,93.2)
GPIO14.1: J3.15 U1.30 | length 35
  Component Side w0.2: U1.30 156.5,94.3 158.4,92.4 v1(158.7,92.4)
  Solder Side w0.2: J3.15 153.97,75.82 160.4,82.25 160.4,91.3 159.3,92.4 v1(158.7,92.4)
GPIO14.2: J3.14 U1.29 | length 34.7
  Component Side w0.2: U1.29 156.5,93.8 v1(158.7,91.6)
  Solder Side w0.2: J3.14 151.43,74.53 159.6,82.7 159.6,91.2 159.2,91.6 v1(158.7,91.6)
GPIO14.3: J3.13 U1.28 | length 34.2
  Component Side w0.2: U1.28 156.5,93.3 158.2,91.6 158.2,91.3 v1(158.7,90.8)
  Solder Side w0.2: J3.13 148.89,73.14 158.7,82.95 v1(158.7,90.8)
GPIO14.4: J3.12 U1.27 | length 33.3
  Component Side w0.2: U1.27 156.4,92.8 157,92.2 v1(157,90.8)
  Solder Side w0.2: J3.12 146.35,72 157,82.65 v1(157,90.8)
GPIO14.5: J3.11 U1.26 | length 32.8
  Component Side w0.2: U1.26 155.85,92.05 155.85,90.85 v1(155.8,90.8) 155.7,90.7 v1@155.8,90.7
  Solder Side w0.2: J3.11 143.81,70.86 156.1,83.15 156.1,88.8 155.8,89.1 v1@155.8,90.7
GPIO14.8: J3.10 U1.37 | length 41
  Component Side w0.2: v1(153.2,96.4) 153.35,96.4 154.75,97.8 U1.37
  Solder Side w0.2: J3.10 141.27,69.72 155.1,83.55 155.1,94.65 153.35,96.4 v1(153.2,96.4)
GPIO14.9: J3.9 U1.36 | length 40.9
  Component Side w0.2: v1(153.2,95.6) 153.15,95.6 154.85,97.3 U1.36
  Solder Side w0.2: J3.9 138.73,68.53 154.6,84.4 154.6,94.25 v1@153.25,95.6
GPIO14.13: J3.8 U1.22 | length 32.6
  Component Side w0.2: v1@152.5,88.65 U1.22
  Solder Side w0.2: J3.8 136.19,70.74 152.5,87.05 v1(152.5,88.75)
GPIO14.14: J3.7 U1.21 | length 33.4
  Component Side w0.2: v1(151.5,89.25) 151.5,89.2 152,89.7 U1.21
  Solder Side w0.2: J3.7 133.65,69.35 151.5,87.2 v1(151.5,89.25)
GPIO14.15: J3.6 U1.20 | length 39.7
  Component Side w0.2: U1.20 151.5,91.8 152.4,92.7 v1(152.4,93.1)
  Solder Side w0.2: J3.6 131.11,68.01 147.8,84.7 147.8,88.1 152.4,92.7 v1(152.4,93.1)
GPIO15.2: J3.5 U1.19 | length 41.3
  Component Side w0.2: U1.19 151,92.2 151.6,92.8 v1(151.6,93.1)
  Solder Side w0.2: J3.5 128.57,68.37 130.15,69.95 131.95,69.95 147.1,85.1 147.1,88.3 151.6,92.8 v1(151.6,93.1)
GPIO15.3: J3.4 U1.18 | length 43.1
  Component Side w0.2: U1.18 150.5,92.8 v1(150.8,93.1)
  Solder Side w0.2: J3.4 126.03,68.83 128.9,71.7 132.6,71.7 146.4,85.5 146.4,88.7 v1(150.8,93.1)
GPIO15.8: J1.4 U1.39 | length 35.4
  Component Side w0.2: v1(153.2,98) 153.7,98 154.5,98.8 U1.39
  Solder Side w0.2: v1(153.2,98) 156,98 163.8,90.2 163.8,86 172.18,77.62 J1.4
GPIO15.9: J1.3 U1.38 | length 36.5
  Component Side w0.2: v1(153.2,97.2) 153.5,97.2 154.6,98.3 U1.38
  Solder Side w0.2: v1(153.2,97.2) 156,97.2 163,90.2 163,85.6 173.52,75.08 J1.3
LED0: R4.2 U1.7 | length 14.1
  Component Side w0.25: R4.2 142.675,84.5 144.975,86.8 144.975,90.675 U1.7
LED1: R5.2 U1.6 | length 12.2
  Component Side w0.25: R5.2 144,87 144.5,87.5 U1.6
MMC_CLK: MICRO_SD.5 U1.90 | length 38.1
  Component Side w0.2: v1(121.4,119.9) MICRO_SD.5 ; v1(132.4,99.8) 132.4,98 134.7,95.7 138.2,95.7 138.55,96.05 138.55,96.816 139.034,97.3 U1.90
  Solder Side w0.2: v1(121.4,119.9) 121.4,114.5 132.4,103.5 v1(132.4,99.8)
MMC_CMD: MICRO_SD.3 R10.1 U1.91 | length 62.7
  Component Side w0.2: R10.1 114,108.9 114.6,109.5 117.9,109.5 117.9,108.5 118.5,107.9 121.75,107.9 v1(122.65,107) ; v1(119.2,119.9) MICRO_SD.3 ; v1(131.5,99.8) 131.5,98.15 134.35,95.3 138.4,95.3 139,95.9 139,96.266 138.95,96.316 138.95,96.584 139.166,96.8 U1.91
  Solder Side w0.2: v1(119.2,119.9) 119.2,115 131.5,102.7 v1(131.5,99.8) 129.85,99.8 v1(122.65,107)
MMC_DAT0: MICRO_SD.7 R11.1 U1.85 | length 46.7
  Component Side w0.2: R11.1 112.5,110.3 115.7,113.5 v4(125.6,113.5) ; MICRO_SD.7 123.6,119.4 124.2,118.8 v1(125.6,118.8) ; v4(139.2,99.8) U1.85
  Solder Side w0.2: v1(125.6,118.8) 125.6,113.4 v4(139.2,99.8)
MMC_DAT1: MICRO_SD.8 R12.1 U1.83 | length 46.7
  Component Side w0.2: R12.1 111,109.9 115.2,114.1 v4(124.7,114.1) ; v1(124.7,119.9) MICRO_SD.8 ; v4(135.6,101.8) 137.599,101.8 138.599,100.8 U1.83
  Solder Side w0.2: v1@124.7,120 v1(124.7,119.9) 124.7,112.7 v4(135.6,101.8)
MMC_DAT2: MICRO_SD.1 R9.1 U1.82 | length 42.8
  Component Side w0.2: R9.1 v4(117,108.9) ; v1(117,118.7) MICRO_SD.1 ; v4(119.6,109.2) 122.5,109.2 v1(122.9,108.8) ; v1@129.3,102.3 129.4,102.4 137.8,102.4 138.9,101.3 U1.82
  Solder Side w0.2: v4(117,108.9) 117,109.1 117.1,109.2 v4(119.6,109.2) ; v1(117,118.7) 117,114.7 v1(122.9,108.8) v1(129.3,102.4)
MMC_DAT3: MICRO_SD.2 R8.1 U1.84 | length 53
  Component Side w0.2: R8.1 v4(115.5,108.9) ; v1(118.1,118.7) MICRO_SD.2 ; v4(118.5,109.9) 118.5,109.4 119.5,108.4 122.1,108.4 v1(122.5,108) ; v1(130.7,100.7) 138.204,100.7 138.45,100.454 138.45,100.45 138.6,100.3 U1.84
  Solder Side w0.2: v4(115.5,108.9) 115.5,109.6 115.8,109.9 v4(118.5,109.9) ; v1(118.1,118.7) 118.1,115.3 130.7,102.7 v1(130.7,100.7) ; v1(122.5,108) 128.1,102.4
NetC9_2: C9.2 C10.2 C11.2 C12.2 C13.2 U1.12 U1.42 U1.64 U1.86 | length 47.5
  Component Side w0.3: C9.2 138.3,99.9 138.9,99.3 U1.86 144,99.3 ; 146.65,94.25 147.2,94.25 147.5,93.95 U1.12 147.5,89.2 148,88.7 C13.2 148.05,88.1 C10.2 ; v1@147.5,103.7 U1.64 C12.2 ; 152,101.05 152,101 152.7,100.3 U1.42 156.9,100.3 157.5,99.7 C11.2
  Component Side w0.5: 146.65,94.3 144.384,94.3 144,94.684 144,99.3 144,102.05 144.25,102.3 v1(147.5,102.3) 151.75,102.3 152,102.05 152,101.05
  Solder Side w0.5: v1(147.5,102.3) v1(147.5,103.8)
NetC14_2: C14.2 U1.61 X1.2 | length 9.1
  Component Side w0.2: U1.61 149,106.995 148.7,107.295 148.7,111.7 X1.2
  Component Side w0.3: X1.2 C14.2
NetC15_2: C15.2 U1.62 X1.1 | length 9
  Component Side w0.2: X1.1 148.3,111.7 148.3,107.2 148.5,107 U1.62
  Component Side w0.3: C15.2 X1.1
NetC16_2: C16.2 U1.16 X2.2 | length 13.5
  Component Side w0.3: U1.16 149.5,89.6 149.85,89.25 150.45,89.25 155.6,84.1 X2.2 C16.2
NetC17_2: C17.2 U1.15 X2.1 | length 12.5
  Component Side w0.3: U1.15 149,89.2 149.4,88.8 150.174,88.8 152.4,86.574 X2.1 C17.2
NetC18_2: C18.2 R1.2 R2.2 SW1.1 SW1.2 | length 25.3
  Component Side w0.2: R2.2 v1(150.8,117.8) ; v1(156,115.3) SW1.2
  Component Side w0.25: SW1.1 169.6,117.1 C18.2 R1.2
  Component Side w0.5: SW1.2 SW1.1
  Solder Side w0.2: v1(150.8,117.8) 153.3,115.3 v1(156,115.3)
NetD1_1: D1.1 R4.1 | length 1.6
  Component Side w0.3: D1.1 R4.1
NetD2_1: D2.1 R5.1 | length 1.6
  Component Side w0.3: D2.1 R5.1
NetD3_1: D3.1 J8.2 Q1.2 Q1.4 | length 16.8
  Component Side w1: Q1.4@171.95,50 Q1.2@171.95,55.9
  Component Side w1.25: Q1.4@171.95,50.35 171.95,48.55 173.85,46.65 173.85,46 173.85,43.1 173.3,42.55 173.25,42.55 J8.2
NetD4_1: D4.1 J14.2 Q2.2 Q2.4 | length 16.8
  Component Side w1: Q2.4@162.45,50 Q2.2@162.45,55.9
  Component Side w1.25: Q2.4 162.45,48.55 164.35,46.65 D4.1 164.35,43.1 163.8,42.55 163.75,42.55 J14.2
NetD5_1: D5.1 J15.2 Q3.2 Q3.4 | length 16.8
  Component Side w1: Q3.4 Q3.2
  Component Side w1.25: Q3.4 152.95,48.55 154.85,46.65 D5.1 154.85,43.1 154.3,42.55 154.25,42.55 J15.2
NetD6_1: D6.1 R17.1 | length 1.5
  Component Side w0.5: D6.1 R17.1
NetD7_1: D7.1 R18.1 | length 1.5
  Component Side w0.5: D7.1 R18.1
NetD10_1: D10.1 R21.1 | length 2.2
  Component Side w0.5: D10.1@98.3,63.1 98.5,63.3 98.5,64.9 R21.1@98.3,65.1
NetD11_1: D11.1 R22.1 | length 2
  Component Side w0.5: D11.1 R22.1
NetJ5_3: J5.3 J7.3 R6.2 U2.7 | length 31.3
  Component Side w0.5: J7.3 124.6,42.4 125.4,43.2 140.05,43.2 ; R6.2 140.05,49.85 141.33,51.13 U2.7
  Component Side w1: J5.3 140.05,40.95 140.05,43.2 R6.2
NetJ5_4: J5.4 J7.4 R6.1 U2.6 | length 30.8
  Component Side w0.5: R6.1 141.55,49.35 142.06,49.86 U2.6
  Component Side w1: R6.1 141.55,41.09 J5.4
  Solder Side w0.5: J7.4 127.14,42.84 127.5,43.2 140.9,43.2 142.14,41.96 J5.4
NetJ6_3: J6.3 R7.2 U3.7 | length 13.7
  Component Side w0.3: R7.2 109.15,46.95 109.6,47.4 109.6,50.3 110.43,51.13 U3.7
  Component Side w1: J6.3 109.15,41.05 R7.2
NetJ6_4: J6.4 R7.1 U3.6 | length 11.3
  Component Side w0.3: R7.1 110.65,49.35 111.16,49.86 U3.6
  Component Side w1: R7.1 110.65,40.99 J6.4
NetJ12_1: J12.1 U4.1 | length 5
  Component Side w0.5: U4.1 J12.1
NetJ12_3: J12.3 U4.3 | length 5
  Component Side w0.5: U4.3 J12.3
NetJ12_4: J12.4 U4.4 | length 5
  Component Side w0.5: U4.4 J12.4
NetJ12_5: J12.5 U4.5 | length 5
  Component Side w0.5: U4.5 J12.5
NetJ12_6: J12.6 U4.6 | length 5
  Component Side w0.5: U4.6 J12.6
NetJ12_7: J12.7 U4.7 | length 5
  Component Side w0.5: U4.7 J12.7
NetJ12_8: J12.8 U4.8 | length 5
  Component Side w0.5: U4.8 J12.8
NetJ12_9: J12.9 U4.9 | length 5
  Component Side w0.5: U4.9 J12.9
NetJ12_12: J12.12 U4.12 | length 5
  Component Side w0.5: U4.12 J12.12
NetJ12_13: J12.13 U4.13 | length 5
  Component Side w0.5: U4.13 J12.13
NetJ12_15: J12.15 U4.15 | length 5
  Component Side w0.5: U4.15 J12.15
NetJ13_1: J13.1 U4.30 | length 5
  Component Side w0.5: J13.1 U4.30
NetJ13_5: J13.5 U4.26 | length 5
  Component Side w0.5: J13.5 U4.26
NetJ13_8: J13.8 U4.23 | length 5
  Component Side w0.5: J13.8 U4.23
NetJ13_9: J13.9 U4.22 | length 5
  Component Side w0.5: J13.9 U4.22
NetJ13_10: J13.10 U4.21 | length 5
  Component Side w0.5: J13.10 U4.21
NetJ13_11: J13.11 U4.20 | length 5
  Component Side w0.5: J13.11 U4.20
NetQ1_1: Q1.1 R13.1 | length 2.2
  Component Side w0.5: Q1.1 R13.1
NetQ2_1: Q2.1 R14.1 | length 2.2
  Component Side w0.5: Q2.1 R14.1
NetQ3_1: Q3.1 R15.1 | length 2.2
  Component Side w0.5: Q3.1 R15.1
NODE_LED0: J13.4 R17.2 U4.27 | length 8.5
  Component Side w0.5: U4.27 J13.4 81,86.906 R17.2
NODE_LED1: J13.3 R18.2 U4.28 | length 8.5
  Component Side w0.5: U4.28 J13.3 83.5,86.946 R18.2
NODE_RXD: J13.12 U1.97 U4.19 | length 88.3
  Component Side w0.2: v1(60.6,95) 60.6,91.986 U4.19 ; v1(114.3,94.35) 115.45,94.35 116,93.8 U1.97
  Component Side w0.5: J13.12 U4.19
  Solder Side w0.2: v1(60.6,95) 61.25,94.35 v1(114.3,94.35)
NODE_SW0: C26.2 J13.2 R16.2 SW3.1 SW3.2 U4.29 | length 32.4
  Component Side w0.3: C26.2 95,78.8
  Component Side w0.5: U4.29 J13.2 86.018,85.482 88.6,82.9 SW3.1 ; SW3.2 95,78.8 SW3.1 ; R16.2 SW3.1
NODE_TXD: J13.13 U1.98 U4.18 | length 89.3
  Component Side w0.2: v1(114.3,93.3) 115.9,93.3 U1.98
  Component Side w0.5: J13.13 U4.18
  Solder Side w0.2: U4.18 58.078,93.578 58.4,93.9 109,93.9 109.6,93.3 v1(114.3,93.3)
P1.4: PROGRAM.8 U1.75 | length 31
  Component Side w0.2: v1(141.5,107.2) 142,106.7 U1.75
  Solder Side w0.2: v1(141.5,107.2) 141.5,123.1 144.2,125.8 152.36,125.8 PROGRAM.8
P1.5: PROGRAM.7 U1.74 | length 24.7
  Component Side w0.2: v1@142.3,107.2 142.5,107 U1.74
  Solder Side w0.2: v1(142.35,107.2) 142.35,114.45 149.7,121.8 149.7,122.7 150.5,123.5 152.12,123.5 PROGRAM.7
P2.1: PROGRAM.5 U1.51 | length 21.2
  Component Side w0.2: U1.51 154.1,106 v1(155.2,106)
  Solder Side w0.2: PROGRAM.5@150.98,122.7 PROGRAM.5 157,116.08 157,107.8 v1(155.2,106)
R\E\S\E\T\: PROGRAM.4 R2.1 U1.65 | length 24.2
  Component Side w0.2: U1.65 147,107.7 144.3,110.4 144.3,117.1 145,117.8 147.2,117.8 ; PROGRAM.4 147.2,123.4 147.2,117.8 ; R2.1 147.2,117.8
SW0: C21.2 R3.2 SW2.1 SW2.2 U1.5 | length 35.1
  Component Side w0.3: R3.2 C21.2 ; SW2.2 128,88.5 143.6,88.5 144,88.9 U1.5
  Component Side w0.5: C21.2 SW2.2
TCK: PROGRAM.3 U1.67 | length 21.5
  Component Side w0.2: v1(143.6,120.6) 143.2,120.2 143.2,110.2 146,107.4 U1.67
  Solder Side w0.2: v1(143.6,120.6) 146.94,120.6 PROGRAM.3
TMP05_IN: TEMP_SENS.3 U1.73 | length 17.3
  Component Side w0.25: TEMP_SENS.3 133,114.3 138.5,108.8 142,108.8 143,107.8 U1.73
TMP05_OUT: TEMP_SENS.2 U1.72 | length 16.4
  Component Side w0.25: TEMP_SENS.2 135.54,112.66 138.8,109.4 142.3,109.4 143.5,108.2 U1.72
TMS: PROGRAM.1 U1.66 | length 18.2
  Component Side w0.2: PROGRAM.1 145.9,121.5 143.8,119.4 143.8,110.2 146.5,107.5 U1.66
VAREF: C8.2 L2.1 U1.33 | length 6.6
  Component Side w0.3: U1.33 C8.2 159.2,95.8 159.9,95.1 L2.1
VBAT: J6.1 M1.1 M2.1 | length 95.3
  Solder Side w1.5: M2.1 50.7,50 52,51.3 52,53.7 ; M1.1 48.5,74.5 52,71 52,53.7 ; J6.1 103.52,44.98 94.8,53.7 52,53.7
VDDA: C7.2 L1.1 U1.35 | length 7.8
  Component Side w0.3: U1.35 156.5,96.8 156.9,97.2 156.9,98.1 157.2,98.4 C7.2 159,98.4 159.6,97.8 L1.1
pads on no net: MICRO_SD.S1 MICRO_SD.S2 MICRO_SD.S3 MICRO_SD.S4 U1.1 U1.2 U1.8 U1.9 U1.10 U1.13 U1.14 U1.68 U1.69 U1.70 U1.71 X1.3 X1.4 X2.3 X2.4

## Polygon pours and split planes (outlines as drawn)
GND on Component Side "Component Side-No Net" (solid, pour order 4): 41.6,30.2 41.6,127 177.7,127 177.7,30.2
GND on Solder Side "Solder Side-No Net" (solid, pour order 2): 41.6,30.2 41.6,127 177.7,127 177.7,30.2

## Keep-outs
Keep-Out Layer:
  the board outline again, w0.254

## Other copper
Solder Side:
  text "1629001" at 101,125.1 h1.5 r180
  text "BMS MAIN BOARD V1.0" at 101,123 h1.5 r180
  text "ERHAN YILMAZ" at 101,121 h1.5 r180
  text "EGAL!" at 108.7,57.2 h3 r180

## Silkscreen, mask and mechanical layers (free items; w line width, h text height)
Top Overlay:
  text "GND" at 100.35,112.7 h1
  text "3.3V" at 169.8,112.7 h1
  text "3.3V" at 99.5,110.2 h1
  text "GND" at 170.55,110.15 h1
  text "P5.2" at 169.75,107.6 h1
  text "P1.3" at 99.5,107.5 h1
  text "#RST" at 162.7,107.1 h1
  text "P5.7" at 169.75,105.05 h1
  text "P1.2" at 99.5,105 h1
  text "P2.0" at 169.75,102.55 h1
  text "P1.1" at 99.5,102.5 h1
  text "P1.0" at 99.5,100 h1
  text "P2.2" at 169.75,100 h1
  text "P0.8" at 99.5,97.5 h1
  text "P2.3" at 169.75,97.5 h1
  text "P0.7" at 99.5,95 h1
  text "P2.4" at 169.75,94.95 h1
  text "P3.4" at 99.5,92.5 h1
  text "P2.5" at 169.75,92.4 h1
  text "P3.3" at 99.5,89.9 h1
  text "P2.8" at 169.75,89.9 h1
  text "P0.12" at 98.6,87.5 h1
  text "P2.9" at 169.75,87.3 h1
  text "P2.10" at 168.9,84.8 h1
  text "P0.6" at 107,84.75 h1
  text "P2.14" at 168.9,82.3 h1
  text "P0.11" at 107,82.25 h1
  text "P2.15" at 168.9,79.8 h1
  text "P0.3" at 107,79.65 h1
  text "P15.8" at 168.9,77.2 h1
  text "P0.2" at 107,77.1 h1
  text "ERHAN YILMAZ" at 127.2,74.9 h2
  text "P15.9" at 168.85,74.7 h1
  text "P0.10" at 107,74.6 h1
  text "GND" at 107,72 h1
  text "3.3V" at 169.7,72 h1
  text "BMS MAIN BOARD V1.0" at 125.2,71.4 h1.5
  text "3.3V" at 107,69.5 h1
  text "GND" at 170.5,69.5 h1
  text "1629001" at 125.2,68.4 h1.5
  text "GND" at 119,60.5 h1 r90
  text "GND" at 159.6,60.4 h1 r90
  text "3.3V" at 121.5,59.6 h1 r90
  text "P0.9" at 124,59.6 h1 r90
  text "3.3V" at 162.1,59.6 h1 r90
  text "P15.3" at 126.5,58.75 h1 r90
  text "P15.2" at 129,58.75 h1 r90
  text "P14.9" at 139.15,58.7 h1 r90
  text "P14.8" at 141.75,58.7 h1 r90
  text "P14.5" at 144.3,58.7 h1 r90
  text "P14.4" at 146.9,58.7 h1 r90
  text "P14.3" at 149.3,58.7 h1 r90
  text "P14.2" at 151.9,58.7 h1 r90
  text "P14.1" at 154.5,58.7 h1 r90
  text "P14.0" at 157,58.7 h1 r90
  text "P14.15" at 131.5,57.9 h1 r90
  text "P14.14" at 134.2,57.9 h1 r90
  text "P14.13" at 136.75,57.9 h1 r90
  text "EGAL!" at 118.5,53 h3

## Text inside footprints (layer, text, board x,y; h text height)
M1: Top Overlay "- INPUT +" at 45.5,59.5 h1.5 r90; Top Overlay "-OUTPUT+" at 89.5,60 h1.5 r90
M2: Top Overlay "- INPUT +" at 45.5,35 h1.5 r90; Top Overlay "-OUTPUT+" at 89.5,35.5 h1.5 r90
PROGRAM: Top Overlay "1" at 143.868,121.592 h1; Top Overlay "2" at 143.36,124.132 h1
U4: Top Overlay "ESP8266" at 86.058,110.908 h1.52 r270; Top Overlay "USB" at 46.558,107.908 h1.52 r270